# EAGLE board CT_schematic (EAGLE 7.6.0)

Size 100 x 80 mm. Coordinates in mm from the lower left corner, seen from the top.
Outline: 0,0 100,0 100,80 0,80 0,0
Copper layers (1*16): Top 0.035mm / dielectric 1.5mm / Bottom 0.035mm
Design rules "default": minimum track width 10mil, minimum drill 24mil, track to track 8mil, track to pad 8mil, pad to pad 8mil, via to via 8mil, smd to smd 8mil, copper to edge 40mil, drill to drill 8mil, minimum pad ring 10mil, minimum via ring 8mil, stop-mask expansion 4mil, vias tented up to drill 0mil, thermal gap 10mil

## Footprints (pad centres in the part's own frame; a part is rotated, then mirrored left to right if it is on the bottom)
C0603 = smd 0.8 x 0.8: 1 -0.762,0; 2 0.762,0
C0402 = smd 0.5 x 0.5: 1 -0.508,0; 2 0.508,0
C0805 = smd 1.2 x 1.3: 1 -1.016,0; 2 1.016,0
C1210 = smd 1.2 x 2.5: 1 -1.524,0; 2 1.524,0
EXV-9H = smd 3.505 x 1.676: 1 -2.857,0; 2 2.857,0
L0603 = smd 0.8 x 0.8: 1 -0.762,0; 2 0.762,0
PJ-037B_PACKAGE = drill 3.7 square: 1 12,0 | drill 3.2 square: 2 6,0
R0603 = smd 0.8 x 0.8: 1 -0.762,0; 2 0.762,0
LQFP64 = smd 0.3 x 1.2: 1 -3.75,-5.75; 2 -3.25,-5.75; 3 -2.75,-5.75; 4 -2.25,-5.75; 5 -1.75,-5.75; 6 -1.25,-5.75; 7 -0.75,-5.75; 8 -0.25,-5.75; 9 0.25,-5.75; 10 0.75,-5.75; 11 1.25,-5.75; 12 1.75,-5.75; 13 2.25,-5.75; 14 2.75,-5.75; 15 3.25,-5.75; 16 3.75,-5.75; 33 3.75,5.75; 34 3.25,5.75; 35 2.75,5.75; 36 2.25,5.75; 37 1.75,5.75; 38 1.25,5.75; 39 0.75,5.75; 40 0.25,5.75; 41 -0.25,5.75; 42 -0.75,5.75; 43 -1.25,5.75; 44 -1.75,5.75; 45 -2.25,5.75; 46 -2.75,5.75; 47 -3.25,5.75; 48 -3.75,5.75 | smd 1.2 x 0.3: 17 5.75,-3.75; 18 5.75,-3.25; 19 5.75,-2.75; 20 5.75,-2.25; 21 5.75,-1.75; 22 5.75,-1.25; 23 5.75,-0.75; 24 5.75,-0.25; 25 5.75,0.25; 26 5.75,0.75; 27 5.75,1.25; 28 5.75,1.75; 29 5.75,2.25; 30 5.75,2.75; 31 5.75,3.25; 32 5.75,3.75; 49 -5.75,3.75; 50 -5.75,3.25; 51 -5.75,2.75; 52 -5.75,2.25; 53 -5.75,1.75; 54 -5.75,1.25; 55 -5.75,0.75; 56 -5.75,0.25; 57 -5.75,-0.25; 58 -5.75,-0.75; 59 -5.75,-1.25; 60 -5.75,-1.75; 61 -5.75,-2.25; 62 -5.75,-2.75; 63 -5.75,-3.25; 64 -5.75,-3.75
SAMTEC_FTSH-105-01-L-DV-K = smd 0.762 x 2.794: 1 -2.54,-2.032; 2 -2.54,2.032; 3 -1.27,-2.032; 4 -1.27,2.032; 5 0,-2.032; 6 0,2.032; 7 1.27,-2.032; 8 1.27,2.032; 9 2.54,-2.032; 10 2.54,2.032
QFN-16 = smd 0.813 x 0.305: 1 -1.448,0.75; 2 -1.448,0.25; 3 -1.448,-0.25; 4 -1.448,-0.75; 9 1.448,-0.75; 10 1.448,-0.25; 11 1.448,0.25; 12 1.448,0.75 | smd 0.305 x 0.813: 5 -0.75,-1.448; 6 -0.25,-1.448; 7 0.25,-1.448; 8 0.75,-1.448; 13 0.75,1.448; 14 0.25,1.448; 15 -0.25,1.448; 16 -0.75,1.448 | smd 1.803 x 1.803: 17 0,0
QFN-28 = smd 0.813 x 0.305: 1 -2.451,1.5; 2 -2.451,1; 3 -2.451,0.5; 4 -2.451,0; 5 -2.451,-0.5; 6 -2.451,-1; 7 -2.451,-1.5; 15 2.451,-1.5; 16 2.451,-1; 17 2.451,-0.5; 18 2.451,0; 19 2.451,0.5; 20 2.451,1; 21 2.451,1.5 | smd 0.305 x 0.813: 8 -1.5,-2.451; 9 -1,-2.451; 10 -0.5,-2.451; 11 0,-2.451; 12 0.5,-2.451; 13 1,-2.451; 14 1.5,-2.451; 22 1.5,2.451; 23 1,2.451; 24 0.5,2.451; 25 0,2.451; 26 -0.5,2.451; 27 -1,2.451; 28 -1.5,2.451 | smd 3.607 x 3.607: 29 0,0
SJ-43515TS-SMT-TR = smd 2.2 x 3: 1 0.6,-7.4; 4 3.4,-7.4 | smd 3 x 3: 2 12.8,-7.4; 5 17,-3 | smd 2 x 3: 3 5.3,0; 6 2.5,0 | drill 1.8: P$7 4.5,-3.69; P$8 11.54,-3.69
ASEK = smd 1.4 x 1: 1 -1.1,-0.8; 2 1.1,-0.8; 3 1.1,0.8; 4 -1.1,0.8
ASFL1 = smd 1.7 x 1.5: 1 -1.27,-1.1; 2 1.27,-1.1; 3 1.27,1.1; 4 -1.27,1.1
SOIC-8_EP = smd 1.6 x 0.533: 1 -2.921,1.905; 2 -2.921,0.635; 3 -2.921,-0.635; 4 -2.921,-1.905; 5 2.921,-1.905; 6 2.921,-0.635; 7 2.921,0.635; 8 2.921,1.905 | smd 2.54 x 3.302: EPAD 0,0 | drill 0.406 pad 0.406: P$1 -0.508,0.635; P$2 0.381,0.635; P$3 -0.508,-0.635; P$4 0.381,-0.635
SON-6 = smd 0.55 x 0.3: 1 -0.355,0.5 | smd 0.52 x 0.3: 2 -0.37,0; 3 -0.37,-0.5; 4 0.37,-0.5; 5 0.37,0; 6 0.37,0.5
SW_4-1437565-2 = smd 1.4 x 2.1: 1 -2.23,4.55; 2 -2.23,-4.55; 3 2.23,4.55; 4 2.23,-4.55
LGM67K-G1J2-24-Z = smd 0.8 x 1.4: A -2,0; C 0,0
NC7SZ125M5X = smd 1.3 x 0.7: 1 -1.3,0.95; 2 -1.3,0; 3 -1.3,-0.95; 4 1.3,-0.95; 5 1.3,0.95

## Placement (x,y rotation side)
C1  1e-07  [C0603]  -48.26,64.77 0 top  (outside the outline)
C2  1e-07  [C0603]  -52.07,64.77 0 top  (outside the outline)
C3  1e-07  [C0603]  -55.88,64.77 0 top  (outside the outline)
C4  1e-07  [C0603]  -59.69,64.77 0 top  (outside the outline)
C5  4.7e-06  [C0603]  -44.45,64.77 0 top  (outside the outline)
C6  1e-07  [C0603]  -63.5,64.77 0 top  (outside the outline)
C7  1e-08  [C0603]  -67.31,64.77 0 top  (outside the outline)
C8  1e-06  [C0603]  -71.12,64.77 0 top  (outside the outline)
C9  1e-07  [C0603]  -74.93,64.77 0 top  (outside the outline)
C10  1e-07  [C0402]  -57.15,69.85 0 top  (outside the outline)
C11  4.7e-06  [C0805]  -73.66,52.07 0 top  (outside the outline)
C12  1e-07  [C0402]  -60.96,69.85 0 top  (outside the outline)
C13  1e-07  [C0402]  -64.77,69.85 0 top  (outside the outline)
C14  2.2e-05  [C1210]  -24.13,53.34 0 top  (outside the outline)
C15  2.2e-05  [C1210]  -30.48,53.34 0 top  (outside the outline)
C16  1e-09  [C0402]  -68.58,69.85 0 top  (outside the outline)
C17  1e-09  [C0402]  -72.39,69.85 0 top  (outside the outline)
C18  1e-07  [C0402]  -76.2,69.85 0 top  (outside the outline)
C19  1e-07  [C0402]  -15.24,74.93 0 top  (outside the outline)
C20  1e-07  [C0402]  -19.05,74.93 0 top  (outside the outline)
C21  1e-07  [C0402]  -22.86,74.93 0 top  (outside the outline)
C22  1e-07  [C0402]  -26.67,74.93 0 top  (outside the outline)
C23  1e-05  [C0805]  -15.24,59.69 0 top  (outside the outline)
C24  1e-05  [C0805]  -20.32,59.69 0 top  (outside the outline)
C25  1e-05  [C0805]  -25.4,59.69 0 top  (outside the outline)
C26  1e-05  [C0805]  -30.48,59.69 0 top  (outside the outline)
C27  1e-05  [C0805]  -35.56,59.69 0 top  (outside the outline)
C28  1e-08  [C0402]  -30.48,74.93 0 top  (outside the outline)
C29  1e-08  [C0402]  -34.29,74.93 0 top  (outside the outline)
C30  1e-08  [C0402]  -38.1,74.93 0 top  (outside the outline)
C31  1e-05  [C1210]  -36.83,53.34 0 top  (outside the outline)
C32  1e-05  [C1210]  -43.18,53.34 0 top  (outside the outline)
C33  1e-05  [C1210]  -49.53,53.34 0 top  (outside the outline)
C34  1e-05  [C1210]  -55.88,53.34 0 top  (outside the outline)
C35  1e-07  [C0402]  -41.91,74.93 0 top  (outside the outline)
C36  0.0001  [EXV-9H]  -38.1,45.72 0 top  (outside the outline)
C37  0.0001  [EXV-9H]  -49.53,45.72 0 top  (outside the outline)
C38  1e-08  [C0402]  -45.72,74.93 0 top  (outside the outline)
C39  1e-08  [C0402]  -49.53,74.93 0 top  (outside the outline)
F1  240.0  [L0603]  -15.24,69.85 0 top  (outside the outline)
J1  PJ-037B  [PJ-037B_PACKAGE]  -55.88,21.59 0 top  (outside the outline)
R2  1000.0  [R0603]  -19.05,69.85 0 top  (outside the outline)
R4  4700.0  [R0603]  -22.86,69.85 0 top  (outside the outline)
R5  2200.0  [R0603]  -26.67,69.85 0 top  (outside the outline)
R6  2200.0  [R0603]  -30.48,69.85 0 top  (outside the outline)
R7  10000.0  [R0603]  -59.69,58.42 0 top  (outside the outline)
R8  10000.0  [R0603]  -64.77,58.42 0 top  (outside the outline)
R9  10000.0  [R0603]  -69.85,58.42 0 top  (outside the outline)
R10  10000.0  [R0603]  -74.93,58.42 0 top  (outside the outline)
R11  5.0  [R0603]  -34.29,69.85 0 top  (outside the outline)
R12  10000.0  [R0603]  -15.24,64.77 0 top  (outside the outline)
R13  47000.0  [R0603]  -20.32,64.77 0 top  (outside the outline)
R14  47000.0  [R0603]  -25.4,64.77 0 top  (outside the outline)
R15  47000.0  [R0603]  -30.48,64.77 0 top  (outside the outline)
R16  680.0  [R0603]  -38.1,69.85 0 top  (outside the outline)
R17  4031.5447154472  [R0603]  -44.45,58.42 0 top  (outside the outline)
R18  2200.0  [R0603]  -41.91,69.85 0 top  (outside the outline)
R19  10000.0  [R0603]  -35.56,64.77 0 top  (outside the outline)
R20  10000.0  [R0603]  -40.64,64.77 0 top  (outside the outline)
R21  9100.0  [R0603]  -45.72,69.85 0 top  (outside the outline)
R22  680000.0  [R0603]  -49.53,58.42 0 top  (outside the outline)
R23  120000.0  [R0603]  -54.61,58.42 0 top  (outside the outline)
U1  STM32L053R6T6  [LQFP64]  -68.58,21.59 0 top  (outside the outline)
U2  FTSH-105-01-L-DV-K  [SAMTEC_FTSH-105-01-L-DV-K]  -35.56,7.62 0 top  (outside the outline)
U3  MMA8451QT  [QFN-16]  -50.8,69.85 0 top  (outside the outline)
U4  WM8731CLSEFL  [QFN-28]  -16.51,53.34 0 top  (outside the outline)
U5  SJ-43515TS-SMT-TR  [SJ-43515TS-SMT-TR]  -68.58,10.16 0 top  (outside the outline)
U6  SJ-43515TS-SMT-TR  [SJ-43515TS-SMT-TR]  -39.37,24.13 0 top  (outside the outline)
U7  ASEK-32.768KHz-ECST  [ASEK]  -29.21,45.72 0 top  (outside the outline)
U8  ASFL1-12.288MHZ-EC-T  [ASFL1]  -49.53,34.29 0 top  (outside the outline)
U9  ASFL1-25MHZ-NCS  [ASFL1]  -66.04,34.29 0 top  (outside the outline)
U10  MIC5234YME  [SOIC-8_EP]  -59.69,44.45 0 top  (outside the outline)
U11  TPS3895ADRYR  [SON-6]  -52.07,73.66 0 top  (outside the outline)
U12  4-1437565-2  [SW_4-1437565-2]  -27.94,35.56 0 top  (outside the outline)
U13  Q65110A2395  [LGM67K-G1J2-24-Z]  -68.58,44.45 0 top  (outside the outline)
U14  nc7sz125m5x  [NC7SZ125M5X]  -60.96,52.07 0 top  (outside the outline)
U15  nc7sz125m5x  [NC7SZ125M5X]  -67.31,52.07 0 top  (outside the outline)

## Library data of the parts
C1-C39 F1 J1 R2 R4-R23 U1-U15 = circuit_tree

## Nets
CLK_U1_3: U1.3 U7.3
CLK_U1_5: U1.5 U9.3
CLK_U4_1: U4.1 U8.3
GND: C1.2 C2.2 C3.2 C4.2 C5.2 C6.2 C7.2 C8.2 C9.2 C10.2 C11.2 C12.2 C13.2 C17.2 C18.2 C19.2 C20.2 C21.2 C22.2 C23.2 C24.2 C25.2 C26.2 C27.2 C28.2 C29.2 C30.2 C31.2 C32.2 C33.2 C34.2 C35.2 C36.2 C37.2 C38.2 C39.2 J1.2 R2.2 R7.2 R11.2 R13.2 R14.2 R15.2 R18.2 R21.2 R23.2 U1.12 U1.18 U1.31 U1.47 U1.63 U2.3 U2.5 U3.5 U3.10 U3.12 U3.17 U4.4 U4.15 U4.19 U4.25 U4.26 U4.29 U5.1 U6.1 U7.2 U8.2 U9.2 U10.7 U10.EPAD U11.2 U13.C U14.2 U14.3 U15.1 U15.3
NET_U1_1: C6.1 U1.1
NET_U1_7: R4.1 U1.7 U15.4
NET_U1_13: C7.1 C8.1 F1.1 U1.13
NET_U1_58: R5.1 U1.58 U3.4
NET_U1_59: R6.1 U1.59 U3.6
NET_U1_60: R7.1 U1.60
NET_U1_61: U13.A
NET_U1_62: U12.3 U12.4
NET_U2_9: R11.1 U2.9
NET_U3_2: C13.1 U3.2
NET_U3_7: R12.1 U3.7
NET_U4_9: U4.9
NET_U4_20: C22.1 C27.1 U4.20
NET_U5_2: C15.1 R14.1 U5.2
NET_U5_5: C14.1 R13.1 U5.5
NET_U5_13: C14.2
NET_U5_14: C15.2
NET_U6_5: C16.1 C17.1 R15.1 R16.1 U6.5
NET_U6_21: R16.2
NET_U6_22: C16.2
NET_U10_4: R17.2 R18.1 U10.4
NET_U11_1: R20.1 R21.1 U11.1
NET_U11_3: R22.2 R23.1 U11.3
NET_U11_4: R19.1 U11.4 U14.4 U15.2
NET_U12_1: R2.1 U12.1 U12.2
PROC_I2S2_CK: U1.34 U4.7
PROC_I2S2_SD: U1.11 U4.8
PROC_I2S2_WS: U1.33 U4.9 U4.11
PROC_SYS_SWCLK: R9.1 U1.49 U2.4
PROC_SYS_SWDIO: R10.1 U1.46 U2.2
RST_OUT_U2_JTAG_RST_B: R8.1 U2.10 U14.1
VCC_S1_13V3: C31.1 C32.1 C36.1 C37.1 J1.1 U10.5 U10.8
VCC_TIER1_3V3: C1.1 C2.1 C3.1 C4.1 C5.1 C9.1 C10.1 C11.1 C12.1 C18.1 C19.1 C20.1 C21.1 C23.1 C24.1 C25.1 C26.1 C28.1 C29.1 C30.1 C33.1 C34.1 C35.1 C38.1 C39.1 F1.2 R4.2 R5.2 R6.2 R8.2 R9.2 R10.2 R12.2 R17.1 R19.2 R20.2 R22.1 U1.19 U1.32 U1.48 U1.64 U2.1 U3.1 U3.14 U4.3 U4.5 U4.12 U4.18 U7.4 U8.4 U9.4 U10.1 U11.6 U14.5 U15.5

## Tracks (layer width: path | path; a pad name or v marks a point on that pad's centre or on a via)
CLK_U1_3  (1 unrouted)
CLK_U1_5  (1 unrouted)
CLK_U4_1  (1 unrouted)
GND  (75 unrouted)
NET_U1_1  (1 unrouted)
NET_U1_7  (2 unrouted)
NET_U1_13  (3 unrouted)
NET_U1_58  (2 unrouted)
NET_U1_59  (2 unrouted)
NET_U1_60  (1 unrouted)
NET_U1_62  (1 unrouted)
NET_U2_9  (1 unrouted)
NET_U3_2  (1 unrouted)
NET_U3_7  (1 unrouted)
NET_U4_20  (2 unrouted)
NET_U5_2  (2 unrouted)
NET_U5_5  (2 unrouted)
NET_U6_5  (4 unrouted)
NET_U10_4  (2 unrouted)
NET_U11_1  (2 unrouted)
NET_U11_3  (2 unrouted)
NET_U11_4  (3 unrouted)
NET_U12_1  (2 unrouted)
PROC_I2S2_CK  (1 unrouted)
PROC_I2S2_SD  (1 unrouted)
PROC_I2S2_WS  (2 unrouted)
PROC_SYS_SWCLK  (2 unrouted)
PROC_SYS_SWDIO  (2 unrouted)
RST_OUT_U2_JTAG_RST_B  (2 unrouted)
VCC_S1_13V3  (6 unrouted)
VCC_TIER1_3V3  (54 unrouted)